# Altium PCB HU_revB.PcbDoc (part 4 of 5)
Units mm, origin at the board's own origin, x right, y up, seen from the top; angles counter-clockwise.
Board outline 164 x 90 mm, 6 copper layers (TOP, GND1, INT SIG, PWR + INT SIG, GND2, BOT), stack 1.538 mm thick; 404 components, 380 nets, 1687 pads, 342 vias.
Unrouted connection lines stored in the file: 70.
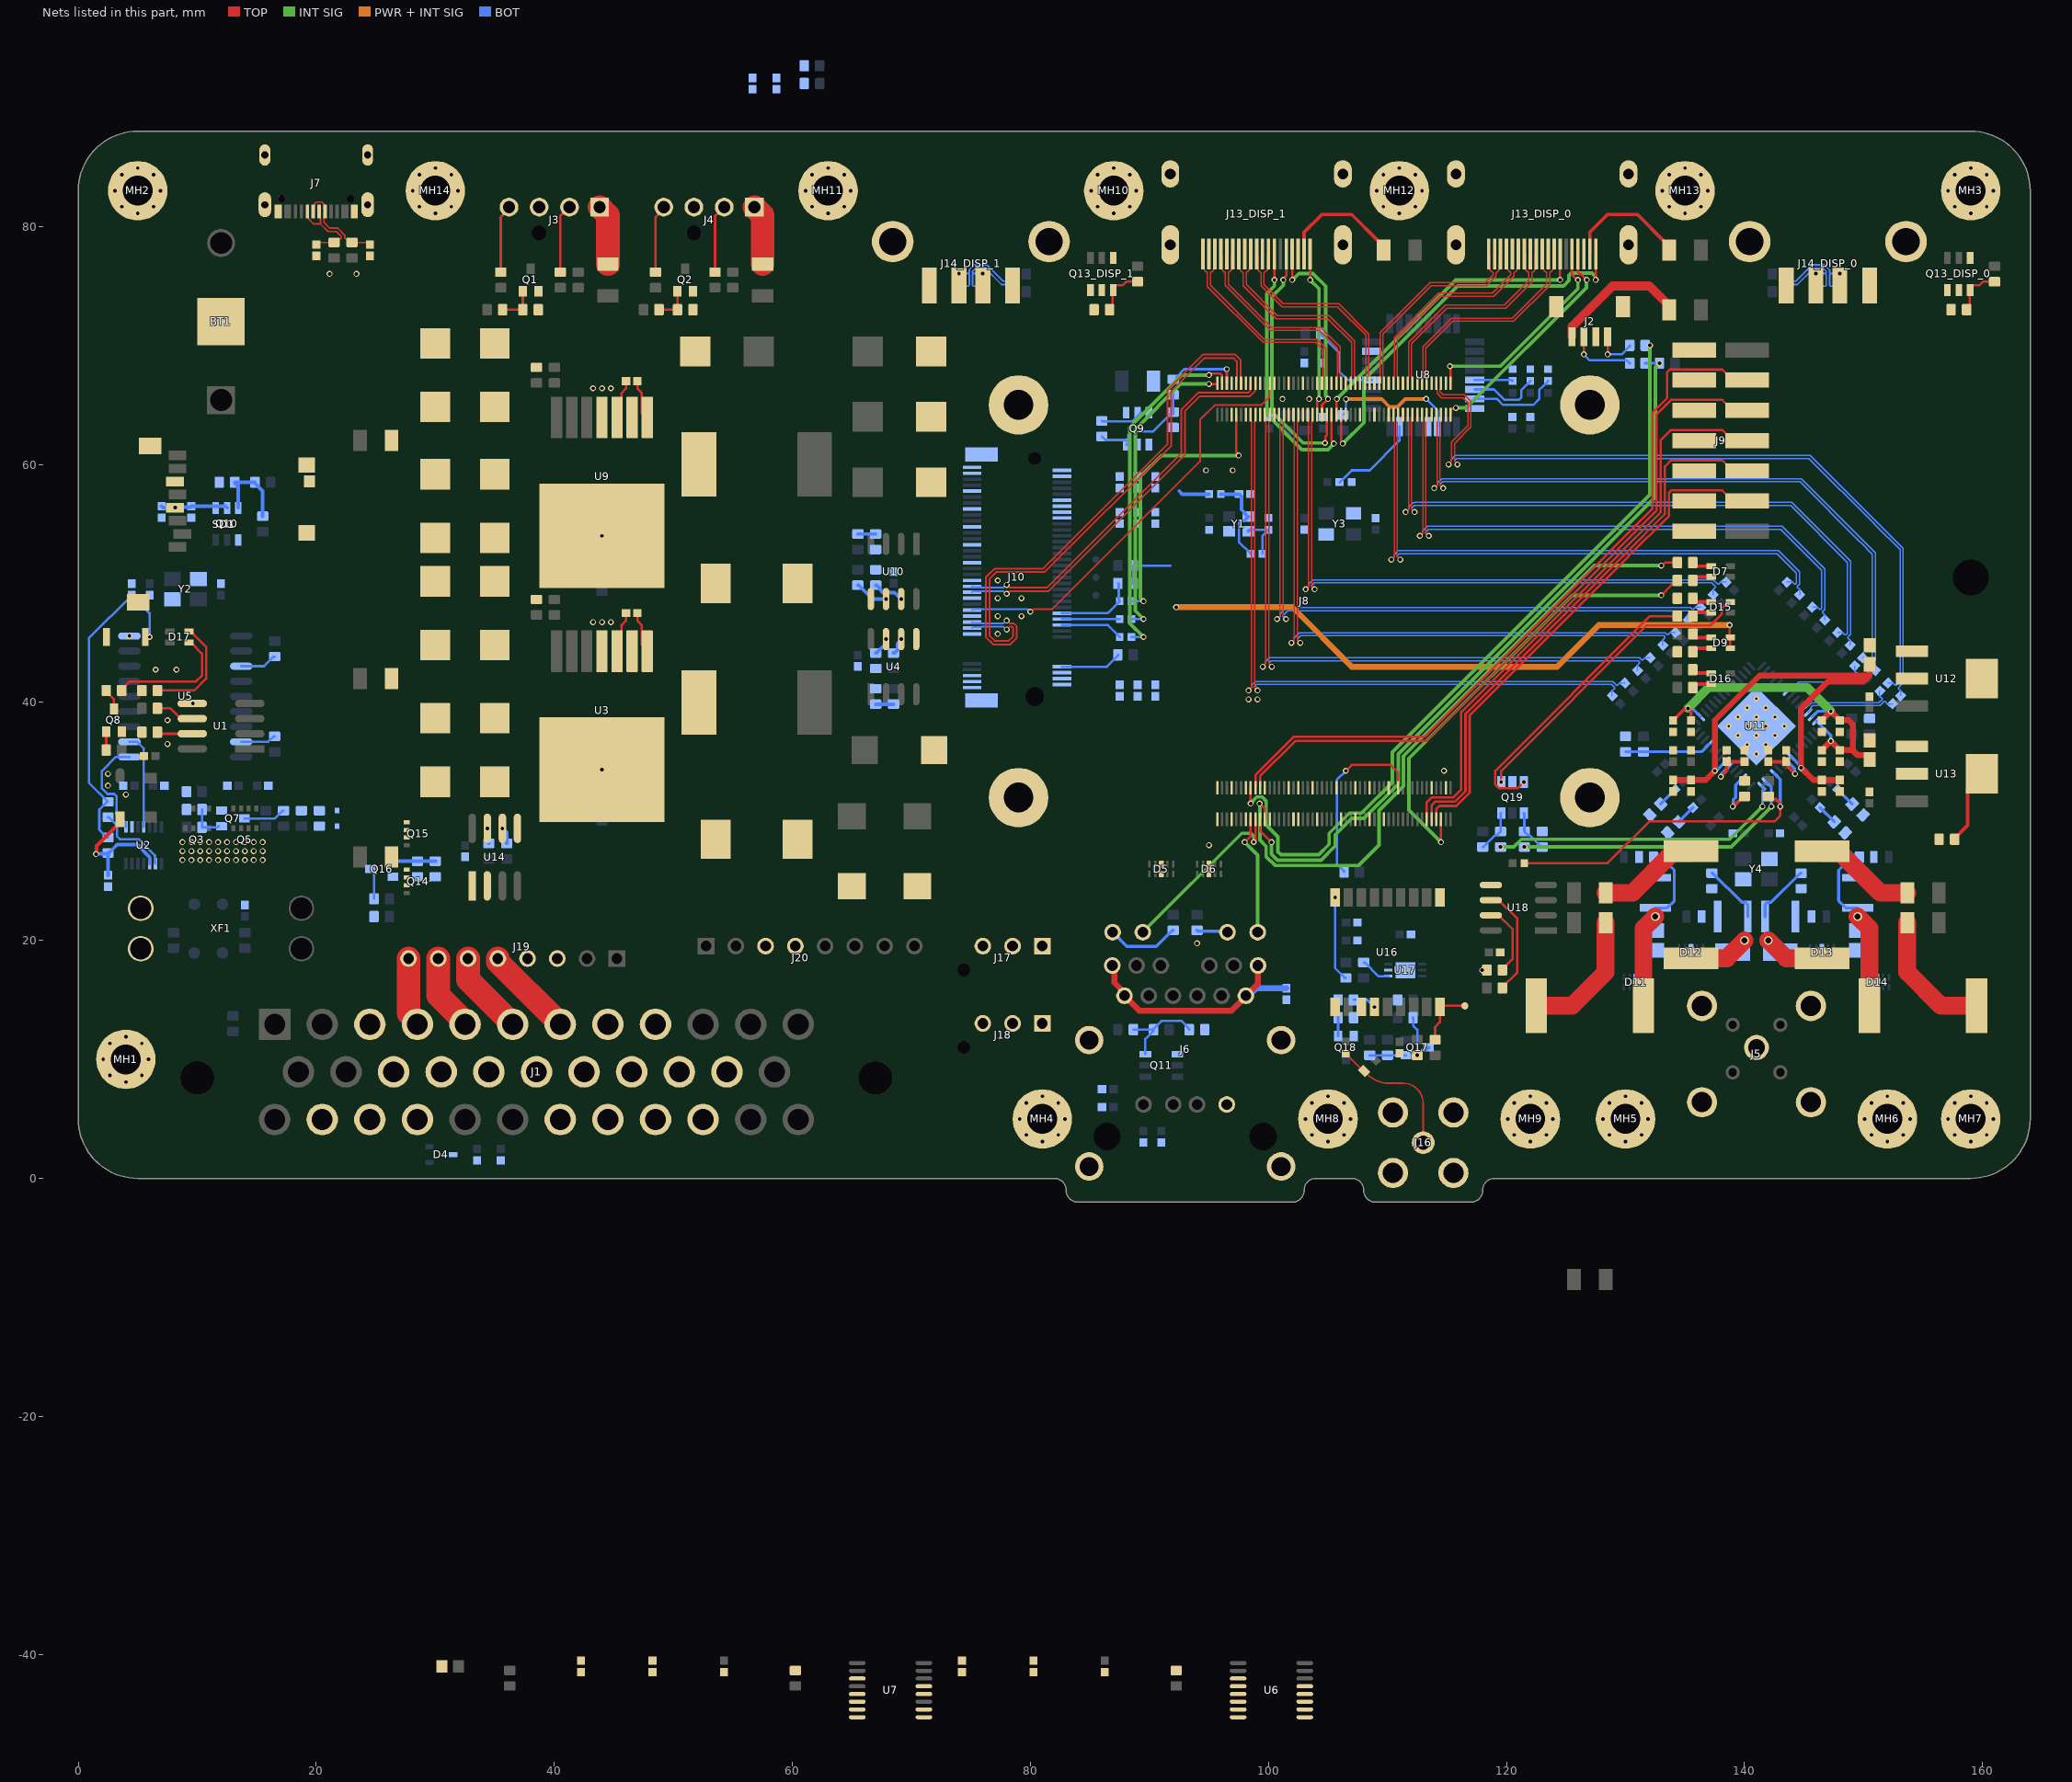
[diagram p7: the nets of this part, all layers, seen from the top]

## Via types
v1: diameter 0.5, hole 0.3, TOP to BOT, 322 vias
v2: diameter 0.5, hole 0.2, TOP to BOT, 16 vias
v3: diameter 0.75, hole 0.5, TOP to BOT, 4 vias

## Nets (pads, with @x,y where several pads share a name; then routed paths per layer and width w, separated by ;. In a path a pad name is that pad's centre, name@x,y a point inside that pad or via, vN(x,y) a via of type N, cw(c..) or ccw(c..) an arc to the next point about the centre after c; other vN are vias at no path point) (continued)
DB2_P: C126.2 U11.49 | length 7.3
  BOT w0.103: U11.49@143.563,40.917 143.818,41.172 143.993,41.172 144.532,41.711 148.775,41.711 149.434,42.371 149.434,42.456 149.237,42.653 149.237,43.055 C126.2@149.253,43.071
DB3_N: C129.2 U11.54 | length 7.7
  BOT w0.103: U11.54@145.331,39.149 145.586,39.404 145.586,39.579 145.73,39.723 151.387,39.723 151.734,40.07 151.82,40.07 152.017,39.873 152.419,39.873 C129.2@152.435,39.889
DB3_P: C128.2 U11.53 | length 7.7
  BOT w0.103: U11.53@144.977,39.503 145.232,39.757 145.407,39.757 145.625,39.976 151.282,39.976 151.556,40.249 151.556,40.334 151.359,40.531 151.359,40.934 C128.2@151.374,40.949
DBG_USB_N: C133.1 J7.A7 J7.B7 R140.1 | length 8
  TOP w0.135: J7.A7@19.75,81.25 19.832,81.332 19.832,81.86 20.01,82.038 20.49,82.038 20.668,81.86 20.668,81.332 J7.B7@20.75,81.25 20.668,81.168 20.668,80.693 20.643,80.668 20.643,80.329 21.109,79.863 21.794,79.863 22.393,79.265 22.393,79.034 22.472,78.955 22.695,78.955 R140.1@23,78.65 24.329,78.65 C133.1@24.5,78.479
DBG_USB_P: C132.1 J7.A6 J7.B6 R23.1 | length 7.6
  TOP w0.135: J7.B6@19.25,81.25 19.332,81.168 19.332,80.64 19.761,80.211 20.357,80.211 ; C132.1@20,78.479 20.171,78.65 R23.1@21.5,78.65 21.805,78.955 22.028,78.955 22.107,79.034 22.107,79.146 21.676,79.578 20.991,79.578 20.357,80.211 ; J7.A6@20.25,81.25 20.332,81.168 20.332,80.693 20.357,80.668 20.357,80.211
DES_1V2: C83.1 C88.2 C89.2 C90.2 C91.2 C98.2 C99.2 R102.2 U11.30 U11.55 U11.56 U13.2 U13.4 | length 37.2
  TOP w0.3: C98.2@134,38.479 134,38.5 134.962,39.462 135.212,39.462 v1(135.25,39.5) 135.25,39.482 135.5,39.232 C99.2@135.5,38.479 ; R102.2@157.65,28.5 157.65,28.575 158.75,29.675 158.75,32.75 U13.4@159,33
  TOP w0.5: C91.2@146.5,35.979 146.5,36 v1(147.25,36.75) ; C89.2@146.5,38.479 146.5,38.5 v1(147.25,39.25) 148,38.5 148.75,38.5 149.086,38.164 149.086,35.979 ; v1@147.306,36.694 148,36 C90.2@148,35.979 149.086,35.979 ; C83.1@150.5,35.198 150.5,35.296 150.244,35.552 149.512,35.552 149.086,35.979
  INT SIG w0.75: v1(135.25,39.5) 137,41.25 145.25,41.25 v1(147.25,39.25)
  BOT w0.25: v1(135.25,39.5) 135.298,39.452 135.659,39.452 U11.30@136.315,38.795 ; U11.55@145.685,38.795 146.139,39.25 v1(147.25,39.25) ; U11.56@146.038,38.442 147.25,37.23 v1(147.25,36.75)
DES_1V8: C81.1 C92.2 C93.2 C94.2 C95.2 U11.7 U11.21 U12.2 U12.4 | length 41.5
  TOP w0.5: C94.2@134,33.479 C95.2@135.5,33.479 136.729,33.479 v1(137.5,34.25) 137.5,38.5 141.25,42.25 150.5,42.25 C81.1@150.5,43.198 ; C92.2@148,33.479 C93.2@146.5,33.479 145.771,33.479 v1(144.75,34.5) 144.75,39.5 147,41.75 150,41.75 150.389,42.139
  BOT w0.25: v1(137.5,34.25) 137.548,34.298 137.651,34.298 U11.21@138.437,35.083 ; U11.7@143.917,35.437 144.702,34.651 144.702,34.548 v1(144.75,34.5)
DIGI_USB_DISP_0_N: C57.1 J14_DISP_0.2 R83.1 | length 7.7
  BOT w0.135: R83.1@143.65,76 143.955,75.695 143.955,75.472 144.034,75.393 144.308,75.393 145.694,76.779 146.714,76.779 147.143,76.35 147.143,76.119 147.222,76.04 ; C57.1@148,74.979 147.222,74.979 147.143,75.058 147.143,75.961 147.222,76.04 ; v1(148,76.04) 147.222,76.04
DIGI_USB_DISP_0_P: C56.1 J14_DISP_0.3 R82.1 | length 7.2
  BOT w0.135: R82.1@143.65,74.5 143.955,74.805 143.955,75.028 144.034,75.107 144.427,75.107 145.812,76.493 146.596,76.493 146.857,76.231 146.857,76.119 146.778,76.04 ; C56.1@146,74.979 146.778,74.979 146.857,75.058 146.857,75.961 146.778,76.04 ; v1(146,76.04) 146.778,76.04
DIGI_USB_DISP_1_N: C51.1 J14_DISP_1.2 R79.1 | length 7.2
  BOT w0.135: C51.1@76,74.979 75.222,74.979 75.143,75.058 75.143,75.961 75.222,76.04 ; v1(76,76.04) 75.222,76.04 ; R79.1@78.35,74.5 78.045,74.805 78.045,75.028 77.966,75.107 77.573,75.107 76.188,76.493 75.404,76.493 75.143,76.231 75.143,76.119 75.222,76.04
DIGI_USB_DISP_1_P: C50.1 J14_DISP_1.3 R76.1 | length 7.7
  BOT w0.135: C50.1@74,74.979 74.778,74.979 74.857,75.058 74.857,75.961 74.778,76.04 ; v1(74,76.04) 74.778,76.04 ; R76.1@78.35,76 78.045,75.695 78.045,75.472 77.966,75.393 77.692,75.393 76.306,76.779 75.286,76.779 74.857,76.35 74.857,76.119 74.778,76.04
DISP_5V_DISP_0: J14_DISP_0.1 Q13_DISP_0.1 Q13_DISP_0.2
DISP_5V_DISP_1: J14_DISP_1.1 Q13_DISP_1.1 Q13_DISP_1.2
DP0PUR: R69.1 U8.27 | length 11.4
  PWR + INT SIG w0.3: v1(106.514,65.486) 109.514,65.486 110.155,64.845 110.845,64.845 111.5,65.5 v1(113.25,65.5)
  BOT w0.135: R69.1@106.25,64.15 106.514,64.414 v1(106.514,65.486)
  BOT w0.2: v1(113.25,65.5) 114.2,64.55 U8.27@114.2,63.175
DPHY0_CK_N: C121.1 J8.127 | length 53.6
  TOP w0.103: v1(100.725,47) 100.774,47 100.974,47.2 100.974,63.636 100.9,63.71 J8.127@100.9,64.18
  BOT w0.103: v1(100.725,47) 100.736,47 100.974,47.238 100.974,47.428 101.498,47.953 135.469,47.953 135.613,47.808 135.698,47.808 135.895,48.005 136.298,48.005 C121.1@136.313,47.99
DPHY0_CK_P: C120.1 J8.129 | length 53
  TOP w0.103: J8.129@101.3,64.18 101.3,63.71 101.226,63.636 101.226,47.2 101.426,47 v1(101.475,47)
  BOT w0.103: v1(101.475,47) 101.464,47 101.226,47.238 101.226,47.323 101.603,47.7 135.364,47.7 135.434,47.629 135.434,47.544 135.237,47.347 135.237,46.945 C120.1@135.253,46.929
DPHY0_D0_N: C113.1 J8.115 | length 55.6
  TOP w0.103: v1(98.325,41) 98.574,41.249 98.574,63.636 98.5,63.71 J8.115@98.5,64.18
  BOT w0.103: v1(98.325,41) 98.336,41 98.574,41.238 98.574,41.428 98.898,41.753 128.941,41.753 129.249,41.444 129.334,41.444 129.531,41.641 129.934,41.641 C113.1@129.949,41.626
DPHY0_D0_P: C112.1 J8.117 | length 54.9
  TOP w0.103: J8.117@98.9,64.18 98.9,63.71 98.826,63.636 98.826,41.249 v1(99.075,41)
  BOT w0.103: v1(99.075,41) 99.064,41 98.826,41.238 98.826,41.323 99.003,41.5 128.836,41.5 129.07,41.265 129.07,41.18 128.873,40.983 128.873,40.581 C112.1@128.889,40.565
DPHY0_D1_N: C115.1 J8.121 | length 54.4
  TOP w0.103: v1(99.525,43) 99.774,43.249 99.774,63.636 99.7,63.71 J8.121@99.7,64.18
  BOT w0.103: v1(99.525,43) 99.536,43 99.774,43.238 99.774,43.428 100.088,43.743 131.194,43.743 131.371,43.566 131.456,43.566 131.653,43.763 132.055,43.763 C115.1@132.071,43.747
DPHY0_D1_P: C114.1 J8.123 | length 53.8
  TOP w0.103: J8.123@100.1,64.18 100.1,63.71 100.026,63.636 100.026,43.249 v1(100.275,43)
  BOT w0.103: v1(100.275,43) 100.264,43 100.026,43.238 100.026,43.323 100.193,43.49 131.089,43.49 131.192,43.387 131.192,43.302 130.995,43.105 130.995,42.702 C114.1@131.01,42.687
DPHY0_D2_N: C117.1 J8.133 | length 52.2
  TOP w0.103: v1(101.925,45) 102.174,45.249 102.174,63.636 102.1,63.71 J8.133@102.1,64.18
  BOT w0.103: v1(101.925,45) 101.936,45 102.174,45.238 102.174,45.428 102.598,45.853 133.326,45.853 133.492,45.687 133.577,45.687 133.774,45.884 134.177,45.884 C117.1@134.192,45.869
DPHY0_D2_P: C116.1 J8.135 | length 51.6
  TOP w0.103: J8.135@102.5,64.18 102.5,63.71 102.426,63.636 102.426,45.249 v1(102.675,45)
  BOT w0.103: v1(102.675,45) 102.664,45 102.426,45.238 102.426,45.323 102.703,45.6 133.221,45.6 133.313,45.508 133.313,45.423 133.116,45.226 133.116,44.823 C116.1@133.131,44.808
DPHY0_D3_N: C119.1 J8.139 | length 50.8
  TOP w0.103: v1(103.125,49.5) 103.374,49.749 103.374,61.036 103.374,63.636 103.3,63.71 J8.139@103.3,64.18
  BOT w0.103: v1(103.125,49.5) 103.136,49.5 103.374,49.738 103.374,49.928 103.746,50.3 137.364,50.3 137.735,49.93 137.82,49.93 138.017,50.127 138.419,50.127 C119.1@138.435,50.111
DPHY0_D3_P: C118.1 J8.141 | length 50.2
  TOP w0.103: J8.141@103.7,64.18 103.7,63.71 103.626,63.636 103.626,60.932 103.626,49.749 v1(103.875,49.5)
  BOT w0.103: v1(103.875,49.5) 103.864,49.5 103.626,49.738 103.626,49.823 103.85,50.047 137.259,50.047 137.556,49.751 137.556,49.666 137.359,49.469 137.359,49.066 C118.1@137.374,49.051
DPHY1_CK_N: C131.1 J8.187 | length 50.7
  TOP w0.103: v1(112.725,54) 112.974,54.249 112.974,62.442 112.974,63.636 112.9,63.71 J8.187@112.9,64.18
  BOT w0.103: v1(112.725,54) 112.736,54 112.974,54.238 112.974,54.428 113.346,54.8 143.158,54.8 146.743,51.215 146.743,47.806 146.566,47.629 146.566,47.544 146.763,47.347 146.763,46.945 C131.1@146.747,46.929
DPHY1_CK_P: C130.1 J8.189 | length 49.7
  TOP w0.103: J8.189@113.3,64.18 113.3,63.71 113.226,63.636 113.226,62.337 113.226,54.249 v1(113.475,54)
  BOT w0.103: v1(113.475,54) 113.464,54 113.226,54.238 113.226,54.323 113.45,54.547 143.053,54.547 146.49,51.11 146.49,47.911 146.387,47.808 146.302,47.808 146.105,48.005 145.702,48.005 C130.1@145.687,47.99
DPHY1_D0_N: C123.1 J8.175 | length 49.9
  TOP w0.103: v1(110.325,52) 110.574,52.249 110.574,61.992 110.574,63.636 110.5,63.71 J8.175@110.5,64.18
  BOT w0.103: v1(110.325,52) 110.336,52 110.574,52.238 110.574,52.428 110.898,52.753 142.847,52.753 144.619,50.981 144.619,49.925 144.444,49.751 144.444,49.666 144.641,49.469 144.641,49.066 C123.1@144.626,49.051
DPHY1_D0_P: C122.1 J8.177 | length 48.8
  TOP w0.103: J8.177@110.9,64.18 110.9,63.71 110.826,63.636 110.826,61.887 110.826,52.249 v1(111.075,52)
  BOT w0.103: v1(111.075,52) 111.064,52 110.826,52.238 110.826,52.323 111.003,52.5 142.742,52.5 144.366,50.877 144.366,50.03 144.265,49.93 144.18,49.93 143.983,50.127 143.581,50.127 C122.1@143.565,50.111
DPHY1_D1_N: C125.1 J8.181 | length 55.4
  TOP w0.103: v1(111.525,56) 111.774,56.249 111.774,61.58 111.774,63.636 111.7,63.71 J8.181@111.7,64.18
  BOT w0.103: v1(111.525,56) 111.536,56 111.774,56.238 111.774,56.428 111.967,56.622 ; 111.968,56.622 112.042,56.696 cw(c112.293,56.444) 112.293,56.8 113.878,56.8 cw(c113.877,56.444) 113.897,56.799 ccw(c113.925,57.25) 113.925,56.799 114.675,56.799 ccw(c114.675,57.25) 114.703,56.799 cw(c114.723,56.444) 114.722,56.8 143.972,56.8 148.896,51.876 148.896,45.717 148.687,45.508 148.687,45.423 148.884,45.226 148.884,44.823 C125.1@148.869,44.808
DPHY1_D1_P: C124.1 J8.183 | length 54.4
  TOP w0.103: J8.183@112.1,64.18 112.1,63.71 112.026,63.636 112.026,61.475 112.026,56.249 v1(112.275,56)
  BOT w0.103: 112.146,56.443 112.026,56.323 112.026,56.238 112.264,56 v1(112.275,56) ; 112.147,56.444 112.22,56.517 cw(c112.293,56.444) 112.293,56.547 113.877,56.547 cw(c113.877,56.444) 113.882,56.547 ccw(c113.925,57.25) 113.925,56.546 114.675,56.546 ccw(c114.675,57.25) 114.718,56.547 cw(c114.723,56.444) 114.723,56.547 143.868,56.547 148.643,51.771 148.643,45.822 148.508,45.687 148.423,45.687 148.226,45.884 147.823,45.884 C124.1@147.808,45.869
DPHY1_D2_N: C127.1 J8.193 | length 56.4
  TOP w0.103: v1(113.925,58) 114.174,58.249 114.174,63.456 114.174,63.636 114.1,63.71 J8.193@114.1,64.18
  BOT w0.103: v1(113.925,58) 113.936,58 114.174,58.238 114.174,58.428 114.546,58.8 144.758,58.8 149.979,53.579 150.911,52.646 150.985,52.572 150.985,43.564 150.808,43.387 150.808,43.302 151.005,43.105 151.005,42.702 C127.1@150.99,42.687
DPHY1_D2_P: C126.1 J8.195 | length 55.4
  TOP w0.103: J8.195@114.5,64.18 114.5,63.71 114.426,63.636 114.426,63.351 114.426,58.249 v1(114.675,58)
  BOT w0.103: v1(114.675,58) 114.664,58 114.426,58.238 114.426,58.323 114.65,58.547 144.653,58.547 149.621,53.579 149.8,53.4 150.732,52.468 150.732,43.669 150.629,43.566 150.544,43.566 150.347,43.763 149.945,43.763 C126.1@149.929,43.747
DPHY1_D3_N: C129.1 J8.194 | length 64.1
  TOP w0.103: J8.194@114.1,66.82 114.1,66.35 114.174,66.276 114.174,65.991 114.564,65.6 116.342,65.6 116.75,65.192 116.75,63.25 115.374,61.874 115.374,60.249 v1(115.125,60)
  BOT w0.103: v1(115.125,60) 115.136,60 115.374,60.238 115.374,60.428 115.698,60.753 145.505,60.753 151.179,55.079 153.243,53.014 153.318,52.94 153.318,41.653 152.93,41.265 152.93,41.18 153.127,40.983 153.127,40.581 C129.1@153.111,40.565
DPHY1_D3_P: C128.1 J8.196 | length 63.1
  TOP w0.103: J8.196@114.5,66.82 114.5,66.35 114.426,66.276 114.426,66.096 114.669,65.853 116.447,65.853 117.003,65.297 117.003,63.145 115.626,61.769 115.626,60.249 v1(115.875,60)
  BOT w0.103: v1(115.875,60) 115.864,60 115.626,60.238 115.626,60.323 115.803,60.5 145.4,60.5 150.821,55.079 151,54.9 153.065,52.835 153.065,41.758 152.751,41.444 152.666,41.444 152.469,41.641 152.066,41.641 C128.1@152.051,41.626
EEPROM_nWP: J8.20 J9.A3 | length 60.1
  TOP w0.2: J8.20@99.3,32.82 99.3,33.8 102.25,36.75 113.27,36.75 129.15,52.63 129.15,52.655 132.6,56.105 132.6,64.19 133.835,65.425 138.129,65.425 139.014,64.54 J9.A3@140.22,64.54
ETH_SYNC: J8.18 J9.A2 | length 62.9
  TOP w0.2: J8.18@98.9,32.82 98.9,33.9 102.104,37.104 113.129,37.104 128.8,52.775 128.8,52.8 132.25,56.25 132.25,64.335 133.5,65.585 133.5,67.75 133.715,67.965 138.129,67.965 139.014,67.08 J9.A2@140.22,67.08
FAN_PWM: J8.19 R1.2 R134.2 | length 63
  TOP w0.2: J8.19@99.3,30.18 99.3,29.2 v1(100.25,28.25)
  INT SIG w0.3: v1(100.25,28.25) 100.25,27.25 100.75,26.75 104.414,26.75 105.6,27.936 105.6,28.864 106.986,30.25 108.014,30.25 110.9,33.136 110.9,35.673 132.5,57.273 132.5,68.15 v1(132.85,68.5)
  BOT w0.2: R134.2@131.65,68.5 v1(132.85,68.5)
FAN_TACHO: J8.16 R133.2 | length 66.1
  TOP w0.2: v1(98.5,31.5) J8.16@98.5,32.82
  INT SIG w0.3: v1(98.5,31.5) 98.5,31.528 99.022,32.05 99.478,32.05 99.8,31.728 99.8,29.7 100.8,28.7 100.8,27.45 101.05,27.2 104.228,27.2 105.1,28.072 105.1,29 106.8,30.7 107.827,30.7 110.4,33.273 110.4,35.809 132.05,57.459 v1(132.05,70)
FL_N: J1.7 J19.5 | length 7.5
  TOP w2: J19.5@35.25,18.475 35.25,18.2 J1.7@40.376,13.074
FL_P: J1.6 J19.6 | length 7.1
  TOP w2: J19.6@32.75,18.475 32.75,16.7 J1.6@36.5,12.95
FR_N: J1.5 J19.7 | length 6.5
  TOP w2: J19.7@30.25,18.475 30.25,15.376 32.5,13.126 J1.5@32.5,12.95
FR_P: J1.4 J19.8 | length 5.7
  TOP w2: J19.8@27.75,18.475 27.75,13.876 28.376,13.25 J1.4@28.376,13.074
GND: BT1.3 C1.2 C2.2 C3.2 C4.2 C5.2 C6.2 C7.2 C8.1 C9.1 C10.2 C12.2 C13.2 C14.2 C15.2 C16.2 C17.2 C18.2 C19.2 C20.2 C21.2 C22.2 C23.2 C24.2 C25.2 C26.2 C27.2 C28.2 C29.2 C30.2 C31.2 C32.2 C33.2 C34.1 C35.1 C36.1 C37.1 C38.1 C39.1 C40.2 C41.2 C42.2 C43.2 C46.2 C47.1 C48.2 C49.2 C50.2 C51.2 C52.2 C53.2 C54.2 C55.2 C56.2 C57.2 C58.2 C59.2 C60.2 C62.2 C63.2 C64.2 C65.2 C66.2 C67.2 C68.2 C69.2 C78.1 C79.1 C80.1 C81.2 C82.1 C83.2 C84.1 C85.1 C86.1 C87.1 C88.1 C89.1 C90.1 C91.1 C92.1 C93.1 C94.1 C95.1 C96.1 C97.1 C98.1 C99.1 C100.2 C101.2 C102.2 C103.2 C104.2 C106.2 C107.2 C108.2 C109.2 C110.2 C111.2 C132.2 C133.2 D2.2 D4.3 D5.3 D5.8 D6.3 D6.8 D8.2 D10.2 D11.3 D11.8 D12.3 D12.8 D13.3 D13.8 D14.3 D14.8 J1.3 J1.8 J1.9 J1.15 J1.16 J1.17 J1.18 J1.19 J1.20 J1.21 J1.22 J1.25 J1.26 J1.27 J1.30 J1.33 J2.3 J2.5 J2.6 J3.3 J4.3 J5.MH1 J5.MH2 J5.MH3 J5.MH4 J5.MH5 J6.MH1 J6.MH2 J6.MH3 J6.MH4 J6.U4 J7.A1_B12 J7.B1_A12 J7.SH1 J7.SH2 J7.SH3 J7.SH4 J8.1 J8.2 J8.7 J8.8 J8.13 J8.14 J8.22 J8.23 J8.32 J8.33 J8.42 J8.43 J8.52 J8.53 J8.59 J8.60 J8.65 J8.66 J8.71 J8.74 J8.98 J8.107 J8.108 J8.113 J8.114 J8.119 J8.120 J8.125 J8.126 J8.131 J8.132 J8.137 J8.138 J8.144 J8.150 J8.155 J8.156 J8.161 J8.162 J8.167 J8.168 J8.173 J8.174 J8.179 J8.180 J8.185 J8.186 J8.191 J8.192 J8.197 J8.198 J8.201 J8.202 J8.203 J8.204 J9.B1 J9.B2 J9.B3 J9.B4 J9.B5 J9.B6 J9.B7 J10.1 J10.3 J10.9 J10.15 J10.21 J10.27 J10.33 J10.39 J10.45 J10.51 J10.57 J10.71 J10.73 J10.75 J10.76 J10.77 J13_DISP_0.2 J13_DISP_0.5 J13_DISP_0.8 J13_DISP_0.11 J13_DISP_0.17 J13_DISP_0.SH1 J13_DISP_0.SH2 J13_DISP_0.SH3 J13_DISP_0.SH4 J13_DISP_1.2 J13_DISP_1.5 J13_DISP_1.8 J13_DISP_1.11 J13_DISP_1.17 J13_DISP_1.SH1 J13_DISP_1.SH2 J13_DISP_1.SH3 J13_DISP_1.SH4 J14_DISP_0.4 J14_DISP_0.5 J14_DISP_0.6 J14_DISP_1.4 J14_DISP_1.5 J14_DISP_1.6 J16.2 J17.2 J18.2 J19.3 J19.4 J20.3 J20.4 MH1.1 MH2.1 MH3.1 MH4.1 MH5.1 MH6.1 MH7.1 MH8.1 MH9.1 MH10.1 MH11.1 MH12.1 MH13.1 MH14.1 MP1.1 Q1.2 Q2.2 Q7.2 Q8.2 Q9.4 Q10.4 Q11.4 Q13_DISP_0.4 Q13_DISP_1.4 Q16.2 Q18.2 Q19.5 R4.2 R7.2 R12.1 R14.1 R18.1 R30.1 R31.1 R35.1 R42.2 R46.1 R49.1 R51.1 R58.1 R61.1 R64.1 R72.2 R75.2 R80.1 R81.1 R86.1 R87.1 R91.1 R92.1 R94.1 R95.1 R98.1 R99.1 R100.1 R101.1 R102.1 R112.1 R121.2 R124.2 R128.2 R129.1 R141.2 SD1.6 SD1.10 SD1.11 SD1.12 SD1.13 SW1.1 U1.5 U2.2 U3.4 U3.8 U4.5 U5.9 U6.3 U6.12 U7.3 U7.12 U8.7 U8.24 U8.28 U9.4 U9.8 U10.5 U11.57 U12.1 U13.1 U14.5 U16.1 U16.10 U16.12 U17.5 U17.7 U18.5 Y1.2 Y2.2 Y2.4 Y3.2 Y3.4 Y4.2 Y4.4 | length 0.9
  TOP w0.2: D6.3@95,25.5 D6.8@95,26.418
  other v1: 94,19.75 95,28 4,32.25 2.5,33 2.5,34 114.75,34.25 44,34.35 7.5,36.5 7.5,38.5 9.635,39.905 98.325,40.25 99.075,40.25 6.5,42.75 8.25,42.75 4.3,45.58 77.25,45.75 43.25,46.75 44,46.75 44.75,46.75 77.25,47.25 79.25,47.25 77.25,48.75 79.25,48.75 77.25,50.25 44,54 94.75,59.5 97,59.5 101.175,65.5 103.425,65.5 43.25,66.4 44,66.4 44.75,66.4 21.125,76 23.375,76
  other v2: 141,35.667 140.222,36.444 141.778,36.444 139.444,37.222 141,37.222 142.556,37.222 138.667,38 140.222,38 141.778,38 143.333,38 139.444,38.778 141,38.778 142.556,38.778 140.222,39.556 141.778,39.556 141,40.333
GPIO_VREF: J8.78 R27.1 | length 15.2
  TOP w0.2: v1(106.5,34.25) 107,34.75 110.25,34.75 110.9,34.1 J8.78@110.9,32.82
  BOT w0.2: R27.1@106.35,25.75 106.35,25.825 105.75,26.425 105.75,33.5 v1(106.5,34.25)
GPS_nRESET: R116.2 U16.9 | length 7.2
  BOT w0.2: v1(105.6,23.6) 105.6,17.675 106.425,16.85 R116.2@106.5,16.85
HDMI0_CEC: J8.151 J13_DISP_0.13 | length 26.4
  TOP w0.2: J8.151@105.7,64.18 105.7,65.454 v1(105.743,65.497) ; v1(124.5,75.5) J13_DISP_0.13@124.5,77.69
  INT SIG w0.3: v1(105.743,65.497) 105.747,65.497 115.75,75.5 v1(124.5,75.5)
HDMI0_CK_N: J8.190 J13_DISP_0.12 | length 18.4
  TOP w0.103: J8.190@113.3,66.82 113.3,67.29 113.226,67.364 113.226,69.771 115.48,72.025 120.59,72.025 123.626,75.061 123.626,76.128 123.687,76.189 123.732,76.189 123.902,76.359 123.902,77.592 J13_DISP_0.12@124,77.69
HDMI0_CK_P: J8.188 J13_DISP_0.10 | length 18.4
  TOP w0.103: J8.188@112.9,66.82 112.9,67.29 112.974,67.364 112.974,69.875 115.376,72.277 120.485,72.277 123.374,75.166 123.374,76.128 123.313,76.189 123.268,76.189 123.098,76.359 123.098,77.592 J13_DISP_0.10@123,77.69
HDMI0_D0_N: J8.184 J13_DISP_0.9 | length 18.2
  TOP w0.103: J8.184@112.1,66.82 112.1,67.29 112.026,67.364 112.026,70.161 114.99,73.124 119.917,73.124 122.126,75.334 122.126,76.128 122.187,76.189 122.232,76.189 122.402,76.359 122.402,77.592 J13_DISP_0.9@122.5,77.69
HDMI0_D0_P: J8.182 J13_DISP_0.7 | length 18.2
  TOP w0.103: J8.182@111.7,66.82 111.7,67.29 111.774,67.364 111.774,70.266 114.885,73.377 119.812,73.377 121.874,75.439 121.874,76.128 121.813,76.189 121.768,76.189 121.598,76.359 121.598,77.592 J13_DISP_0.7@121.5,77.69
HDMI0_D1_N: J8.178 J13_DISP_0.6 | length 17.8
  TOP w0.103: J8.178@110.9,66.82 110.9,67.29 110.826,67.364 110.826,70.561 114.39,74.124 118.917,74.124 120.626,75.834 120.626,76.128 120.687,76.189 120.732,76.189 120.902,76.359 120.902,77.592 J13_DISP_0.6@121,77.69
HDMI0_D1_P: J8.176 J13_DISP_0.4 | length 17.8
  TOP w0.103: J8.176@110.5,66.82 110.5,67.29 110.574,67.364 110.574,70.666 114.285,74.377 118.812,74.377 120.374,75.939 120.374,76.128 120.313,76.189 120.268,76.189 120.098,76.359 120.098,77.592 J13_DISP_0.4@120,77.69
HDMI0_D2_N: J8.172 J13_DISP_0.3 | length 17.7
  TOP w0.103: J8.172@109.7,66.82 109.7,67.29 109.626,67.364 109.626,70.961 113.69,75.024 118.317,75.024 119.126,75.834 119.126,76.128 119.187,76.189 119.232,76.189 119.402,76.359 119.402,77.592 J13_DISP_0.3@119.5,77.69
HDMI0_D2_P: J8.170 J13_DISP_0.1 | length 17.7
  TOP w0.103: J8.170@109.3,66.82 109.3,67.29 109.374,67.364 109.374,71.066 113.585,75.277 118.212,75.277 118.874,75.939 118.874,76.128 118.813,76.189 118.768,76.189 118.598,76.359 118.598,77.592 J13_DISP_0.1@118.5,77.69
HDMI0_HOTP: J8.153 J13_DISP_0.19 | length 34.6
  TOP w0.2: J8.153@106.1,64.18 106.1,61.981 106.25,61.831 v1(106.25,61.75) ; v1(127.5,75.5) J13_DISP_0.19@127.5,77.69
  INT SIG w0.3: v1(106.25,61.75) 108,63.5 108,67.1 115.9,75 124.8,75 125.25,75.45 125.25,75.888 125.426,76.064 127.186,76.064 127.462,75.788 127.462,75.538 v1(127.5,75.5)
HDMI0_SCL: J8.200 J13_DISP_0.15 | length 18.1
  TOP w0.2: v1(115.25,68.25) 115.3,68.2 J8.200@115.3,66.82 ; J13_DISP_0.15@125.5,77.69 125.5,75.928 125.928,75.5 v1(126,75.5)
  INT SIG w0.3: v1(115.25,68.25) 119.477,68.25 126,74.773 v1(126,75.5)
HDMI0_SDA: J8.199 J13_DISP_0.16 | length 19.4
  TOP w0.2: J8.199@115.3,64.18 115.3,64.65 115.569,64.65 115.669,64.75 v1(115.75,64.75) ; J13_DISP_0.16@126,77.69 126,76.117 126.117,76 126.25,76 v1(126.75,75.5)
  INT SIG w0.3: v1(115.75,64.75) 116.614,64.75 126.712,74.848 126.712,75.462 v1(126.75,75.5)
HDMI1_CEC: J8.149 J13_DISP_1.13 | length 23.3
  TOP w0.2: v1(100.5,75.5) J13_DISP_1.13@100.5,77.69 ; J8.149@105.3,64.18 105.3,62.031 105.5,61.831 v1(105.5,61.75)
  INT SIG w0.3: v1(100.5,75.5) 100.5,75 99.85,74.35 99.85,64.214 102.814,61.25 105,61.25 v1(105.5,61.75)
HDMI1_CK_N: J8.166 J13_DISP_1.12 | length 17.4
  TOP w0.103: J13_DISP_1.12@100,77.69 99.902,77.592 99.902,76.359 99.732,76.189 99.687,76.189 99.626,76.128 99.626,75.124 101.25,73.5 105.892,73.5 108.426,70.966 108.426,67.364 108.5,67.29 J8.166@108.5,66.82
HDMI1_CK_P: J8.164 J13_DISP_1.10 | length 17.4
  TOP w0.103: J13_DISP_1.10@99,77.69 99.098,77.592 99.098,76.359 99.268,76.189 99.313,76.189 99.374,76.128 99.374,75.019 101.145,73.247 105.788,73.247 108.174,70.861 108.174,67.364 108.1,67.29 J8.164@108.1,66.82
HDMI1_D0_N: J8.160 J13_DISP_1.9 | length 17.4
  TOP w0.103: J13_DISP_1.9@98.5,77.69 98.402,77.592 98.402,76.359 98.232,76.189 98.187,76.189 98.126,76.128 98.126,75.124 100.75,72.5 105.092,72.5 107.226,70.366 107.226,67.364 107.3,67.29 J8.160@107.3,66.82
HDMI1_D0_P: J8.158 J13_DISP_1.7 | length 17.4
  TOP w0.103: J13_DISP_1.7@97.5,77.69 97.598,77.592 97.598,76.359 97.768,76.189 97.813,76.189 97.874,76.128 97.874,75.019 100.645,72.247 104.988,72.247 106.974,70.261 106.974,67.364 106.9,67.29 J8.158@106.9,66.82
HDMI1_D1_N: J8.154 J13_DISP_1.6 | length 17.4
  TOP w0.103: J13_DISP_1.6@97,77.69 96.902,77.592 96.902,76.359 96.732,76.189 96.687,76.189 96.626,76.128 96.626,75.139 100.265,71.5 104.392,71.5 106.026,69.866 106.026,67.364 106.1,67.29 J8.154@106.1,66.82
HDMI1_D1_P: J8.152 J13_DISP_1.4 | length 17.4
  TOP w0.103: J13_DISP_1.4@96,77.69 96.098,77.592 96.098,76.359 96.268,76.189 96.313,76.189 96.374,76.128 96.374,75.034 100.161,71.247 104.288,71.247 105.774,69.761 105.774,67.364 105.7,67.29 J8.152@105.7,66.82
HDMI1_D2_N: J8.148 J13_DISP_1.3 | length 17.7
  TOP w0.103: J13_DISP_1.3@95.5,77.69 95.402,77.592 95.402,76.359 95.232,76.189 95.187,76.189 95.126,76.128 95.126,75.039 99.665,70.5 104.092,70.5 104.826,69.766 104.826,67.364 104.9,67.29 J8.148@104.9,66.82
HDMI1_D2_P: J8.146 J13_DISP_1.1 | length 17.7
  TOP w0.103: J13_DISP_1.1@94.5,77.69 94.598,77.592 94.598,76.359 94.768,76.189 94.813,76.189 94.874,76.128 94.874,74.934 99.561,70.247 103.988,70.247 104.574,69.661 104.574,67.364 104.5,67.29 J8.146@104.5,66.82
HDMI1_HOTP: J8.143 J13_DISP_1.19 | length 13.9
  TOP w0.2: v1(103.5,75.5) J13_DISP_1.19@103.5,77.69 ; J8.143@104.1,64.18 104.1,65.269 104.25,65.419 v1(104.25,65.5)
  INT SIG w0.3: v1(103.5,75.5) 104.25,74.75 v1(104.25,65.5)
HDMI1_SCL: J8.147 J13_DISP_1.15 | length 21.8
  TOP w0.2: v1(101.25,75.5) 101.25,75.581 101.5,75.831 J13_DISP_1.15@101.5,77.69 ; v1(104.75,61.8) 104.8,61.85 104.8,62.35 104.9,62.45 J8.147@104.9,64.18
  INT SIG w0.3: v1(101.25,75.5) 101.25,75.05 100.3,74.1 100.3,64.4 102.9,61.8 v1(104.75,61.8)
HDMI1_SDA: J8.145 J13_DISP_1.16 | length 16.7
  TOP w0.2: v1(102,75.5) J13_DISP_1.16@102,77.69 ; J8.145@104.5,64.18 104.5,65 v1(105,65.5)
  INT SIG w0.3: v1(102,75.5) 102.55,76.05 103.728,76.05 104.8,74.978 104.8,65.754 105,65.554 v1(105,65.5)
HDMI_5V_DISP_0: F11_DISP_0.2 J13_DISP_0.18 | length 10.5
  TOP w0.3: J13_DISP_0.18@127,77.69 127,79.5 128.5,81 130.99,81 133.25,78.74 133.67,78.32 F11_DISP_0.2@133.67,78
HDMI_5V_DISP_1: F11_DISP_1.2 J13_DISP_1.18 | length 10.5
  TOP w0.3: J13_DISP_1.18@103,77.69 103,79.5 104.5,81 106.99,81 109.25,78.74 109.67,78.32 F11_DISP_1.2@109.67,78
ID_SC: J8.35
ID_SD: J8.36
LL_FR_L: J17.1
LL_FR_R: J17.3
LL_RR_L: J18.1
LL_RR_R: J18.3
LNA_EN: R123.1 U16.13 | length 2
  BOT w0.2: R123.1@107.15,15 108.3,15 v1(108.9,14.4)
LOCK: R126.2 U11.13 | length 24.4
  INT SIG w0.3: v1(121.5,27.85) 138.878,27.85 142.25,31.222 v1(142.25,31.25)
  BOT w0.25: U11.13@141.795,33.315 142.25,32.861 v1(142.25,31.25)
M2_3V3: C19.1 C20.1 C21.1 C22.1 C23.1 C24.1 C25.1 C26.1 C27.1 D9.2 D9.3 J10.2 J10.4 J10.12 J10.14 J10.16 J10.18 J10.70 J10.72 J10.74 Q9.1 Q9.2 R40.1 R41.1 R48.1 | length 59.2
  TOP w0.2: v1(138.75,46.5) 138.75,45.5 D9.3@138.8,45.45 D9.2@138.8,44.55
  PWR + INT SIG w0.5: v1(92.25,48) 102,48 107,43 124.25,43 127.75,46.5 v1(138.75,46.5)
  BOT w0.2: R41.1@88.65,50 R40.1@88.65,51.5 91.75,51.5
  BOT w0.3: 92.5,57.75 92.75,57.5 R48.1@95,57.5
MFP6: R96.1 R98.2 U11.25 | length 7.3
  BOT w0.25: R98.2@130,35.85 R96.1@131.5,35.85 136.375,35.85 U11.25@137.023,36.497
MIC_N: J1.32
MIC_P: J1.31
nBT_INH: J8.91 J9.A5 | length 46.2
  TOP w0.2: J8.91@113.7,30.18 113.7,31.35 114,31.65 115.649,31.65 116.55,32.551 116.55,39.04 129.85,52.34 129.85,52.365 133.3,55.815 133.3,59.81 133.835,60.345 138.129,60.345 139.014,59.46 J9.A5@140.22,59.46
nERRB: R130.1 U11.14 | length 25.3
  INT SIG w0.3: v1(119.5,27.85) 120.6,27.85 121.25,28.5 138.75,28.5 v1(141.5,31.25)
  BOT w0.25: U11.14@141.442,32.962 141.668,32.736 141.5,32.568 v1(141.5,31.25)
NetC1_1: C1.1 J6.1 J6.6 J6.7 J6.12 | length 20.9
  TOP w0.5: J6.12@86.88,17.89 87.052,17.718 87.052,16.441 87.9,15.594 J6.6@87.9,15.35 89.15,14.1 96.9,14.1 98.1,15.3 J6.1@98.1,15.35 99.12,16.37 J6.7@99.12,17.89
  BOT w0.5: J6.1@98.1,15.35 98.344,15.35 98.972,15.979 C1.1@101.5,15.979
NetC5_1: C5.1 D3.1 R19.2 U2.10 | length 11.4
  TOP w0.3: v1(1.5,27.25) 1.538,27.288 1.538,27.94 3.5,29.902 D3.1@3.5,30.175
  BOT w0.3: v1(1.5,27.25) 1.538,27.288 2.438,27.288 R19.2@2.5,27.35 C5.1@2.5,25.479 ; R19.2@2.575,27.35 2.95,27.725 2.95,27.728 3.272,28.05 4.973,28.05 5.998,27.025 5.998,26.459 U2.10@6,26.457
NetC7_1: C7.1 R19.1 R20.2 SW1.2 | length 27.7
  TOP w0.2: SW1.2@5.625,45.5 v1(6,45.5)
  BOT w0.2: R19.1@2.5,28.65 2.425,28.65 1.775,29.3 1.775,31 2.425,31.65 R20.2@2.5,31.65 0.9,33.25 0.9,45.4 C7.1@4.5,49 ; C7.1@4.5,49.021 C7.1@4.5,49 ; v1(6,45.5) 6,47.5 C7.1@4.5,49
NetC11_1: C11.1 U3.3 | length 3.4
  TOP w0.2: U3.3@45.27,44.45 45.645,44.825 45.645,46.487 46.021,46.864 C11.1@46.021,47.5
NetC11_2: C11.2 D8.1 L2.1 U3.1 | length 3.4
  TOP w0.2: C11.2@46.979,47.5 46.979,46.864 47.355,46.487 47.355,44.825 U3.1@47.73,44.45
NetC12_1: C12.1 C13.1 C14.1 C15.1 F3.2 U3.2
NetC28_1: C28.1 R48.2 R50.1 Y1.4 | length 7.8
  BOT w0.2: Y1.4@98.013,55.313 97.963,55.263 97.68,55.263 97.513,55.095 97.513,53.488 R50.1@98.5,52.5
  BOT w0.3: R48.2@96,57.5 C28.1@97.521,57.5 ; C28.1@97.543,57.5 97.729,57.314 97.729,56.196 97.963,55.963 97.963,55.913 98.263,55.613 Y1.4@98.313,55.613 Y1.4@98.013,55.313
NetC35_2: C35.2 C36.2 R55.2 U6.13
NetC38_2: C38.2 C39.2 R56.2 U7.13
NetC40_1: C40.1 C41.1 Q10.1 Q10.2 SD1.4 | length 5.7
  BOT w0.3: C41.1@7,56.479 7.119,56.36 v1(8.14,56.36) 8.178,56.398 9.42,56.398 C40.1@9.5,56.479 12.375,56.479 12.5,56.354 Q10.2@12.5,56.35
NetC46_1: C46.1 R67.1
NetC48_1: C48.1 R73.1
NetC61_1: C61.1 U9.3 | length 3.4
  TOP w0.2: U9.3@45.27,63.95 45.645,64.325 45.645,65.987 46.021,66.364 C61.1@46.021,67
NetC61_2: C61.2 D10.1 L3.1 U9.1 | length 3.4
  TOP w0.2: C61.2@46.979,67 46.979,66.364 47.355,65.987 47.355,64.325 U9.1@47.73,63.95
NetC62_1: C62.1 C63.1 C64.1 C65.1 F5.2 U9.2
NetC72_2: C72.2 R94.2 | length 1.7
  BOT w0.261: R94.2@132.96,31.46 C72.2@134.162,32.662
NetC73_2: C73.2 R95.2 | length 1.7
  BOT w0.261: R95.2@134.46,29.96 C73.2@135.662,31.162
NetC76_2: C76.2 R100.2 | length 1.7
  BOT w0.261: C76.2@146.338,31.162 R100.2@147.54,29.96
NetC77_2: C77.2 R101.2 | length 1.7
  BOT w0.261: C77.2@147.838,32.662 R101.2@149.04,31.46
NetC84_2: C84.2 C85.2 U11.8 | length 4.2
  TOP w0.3: C84.2@142,35.021 C85.2@143.5,35.021 143.686,34.835 143.686,34.564 v1(144.25,34)
  BOT w0.25: U11.8@143.563,35.083 144.202,34.444 144.202,34.048 v1(144.25,34)
NetC86_2: C86.2 C87.2 U11.20 | length 4.3
  TOP w0.3: v1(138,33.75) 138.5,34.25 C87.2@138.5,35.021 C86.2@140,35.021
  BOT w0.25: v1(138,33.75) 138.048,33.798 138.048,33.987 U11.20@138.79,34.73
NetC100_1: C100.1 L4.2 L5.1 R103.2 | length 13.6
  TOP w1.5: L4.2@131.5,14.5 131.5,21 v3(132.5,22)
  BOT w0.25: L5.1@132.5,22.73 133.5,22.73 134.1,23.33 134.1,25.891 133.695,26.296 133.695,26.955 R103.2@133.65,27
NetC101_1: C101.1 L7.2 L8.1 R104.2 | length 10.2
  TOP w1.5: L7.2@135.5,18.5 138.5,18.5 v3(140,20)
  BOT w0.25: R104.2@137.25,25.65 137.325,25.65 139.775,23.2 140.07,23.2 140.27,23 L8.1@140.27,22
NetC102_1: C102.1 L10.2 L11.1 R105.2 | length 13.6
  TOP w1.5: v3(149.5,22) 150.5,21 L10.2@150.5,14.5
  BOT w0.25: R105.2@148.35,27 148.305,26.955 148.305,26.296 147.9,25.891 147.9,23.33 148.5,22.73 L11.1@149.5,22.73
NetC103_1: C103.1 L13.2 L14.1 R106.2 | length 10.2
  TOP w1.5: v3(142,20) 143.5,18.5 L13.2@146.5,18.5
  BOT w0.25: L14.1@141.73,22 141.73,23 141.93,23.2 142.225,23.2 144.675,25.65 R106.2@144.75,25.65
NetD2_1: D2.1 R13.1 R14.2 U6.4
NetD7_1: D7.1 R25.1 | length 1.7
  TOP w0.3: R25.1@135.65,50.25 135.65,50.3 135.9,50.55 D7.1@137.2,50.55
NetD7_4: D7.4 R26.1 | length 1.7
  TOP w0.3: R26.1@135.65,51.75 135.65,51.7 135.9,51.45 D7.4@137.2,51.45
NetD9_1: D9.1 R42.1 | length 1.7
  TOP w0.3: R42.1@135.65,44.25 135.65,44.3 135.9,44.55 D9.1@137.2,44.55
NetD9_4: D9.4 R44.1 | length 1.7
  TOP w0.3: R44.1@135.65,45.75 135.65,45.7 135.9,45.45 D9.4@137.2,45.45
NetD15_1: D15.1 R127.2 | length 1.7
  TOP w0.3: R127.2@135.65,47.25 135.65,47.3 135.9,47.55 D15.1@137.2,47.55
NetD15_3: D15.3 Q19.4 | length 26.3
  TOP w0.2: v1(119.55,33.3) 119.55,34.245 131.78,46.475 137.129,46.475 138.102,47.448 138.102,47.902 138.65,48.45 D15.3@138.8,48.45
NetD15_4: D15.4 R129.2 | length 1.7
  TOP w0.3: R129.2@135.65,48.7 135.9,48.45 D15.4@137.2,48.45
NetD16_1: D16.1 R138.2 | length 1.7
  TOP w0.3: R138.2@135.65,41.25 135.65,41.3 135.9,41.55 D16.1@137.2,41.55
NetD16_4: D16.4 R139.2 | length 1.7
  TOP w0.3: R139.2@135.65,42.75 135.65,42.7 135.9,42.45 D16.4@137.2,42.45
NetD17_1: D17.1 R141.1 | length 9.2
  TOP w0.2: R141.1@6.65,41 9.75,41 10.75,42 10.75,44.65 9.45,45.95 D17.1@9.3,45.95
NetD17_4: D17.4 R142.1 | length 10.4
  TOP w0.2: R142.1@3.65,41 3.65,41.075 4.325,41.75 9.9,41.75 10.4,42.25 10.4,44.1 D17.4@9.5,45
NetF1_1: F1.1 J2.1 | length 11.5
  TOP w0.75: J2.1@125.5,70.725 125.5,71.6 128.9,75 131.99,75 133.67,73.32 F1.1@133.67,73
NetF2_1: F2.1 J3.1 | length 5.1
  TOP w2: J3.1@43.81,81.62 44.5,80.93 F2.1@44.5,76.83
NetF4_1: F4.1 J4.1 | length 5.1
  TOP w2: J4.1@56.81,81.62 57.5,80.93 F4.1@57.5,76.83
NetF7_2: F7.2 Q14.1 Q14.2 Q14.3 Q15.1 Q15.2 Q15.3 R109.2
NetF10_2: F10.2 Q9.5 Q9.6 R43.2 | length 3.6
  BOT w0.2: R43.2@86,63.65 86.05,63.6 88.525,63.6 89.025,64.1 89.275,64.35
NetF12_2: F12.2 L4.1 | length 11.2
  TOP w1.5: L4.1@122.5,14.5 125.5,14.5 128.33,17.33 F12.2@128.33,21.5
NetF13_2: F13.2 L7.1 | length 8.6
  TOP w1.5: F13.2@128.33,24 130.6,24 133.95,27.35 135.35,27.35 L7.1@135.5,27.5
NetF14_2: F14.2 L10.1 | length 11.2
  TOP w1.5: F14.2@153.67,21.5 153.67,17.33 156.5,14.5 L10.1@159.5,14.5
NetF15_2: F15.2 L13.1 | length 8.6
  TOP w1.5: L13.1@146.5,27.5 146.65,27.35 148.05,27.35 151.4,24 F15.2@153.67,24
nETH_G_LED: J6.15 J8.17 | length 15.3
  TOP w0.2: v1(98.764,28.264) 98.764,28.345 98.9,28.481 J8.17@98.9,30.18
  INT SIG w0.3: J6.15@89.445,20.69 97.755,29 98.5,29 98.764,28.736 v1(98.764,28.264)
nETH_Y_LED: J6.13 J8.15 | length 10.2
  TOP w0.2: v1(98,28.25) 98.5,28.75 J8.15@98.5,30.18
  INT SIG w0.3: v1(98,28.25) 99.095,27.155 J6.13@99.095,20.69
NetJ2_2: J2.2 R134.1 | length 5.6
  TOP w0.2: v1(126.5,69.25) J2.2@126.5,70.725
  BOT w0.2: v1(126.5,69.25) 127,68.75 130.1,68.75 R134.1@130.35,68.5
NetJ2_4: J2.4 R133.1 | length 3.7
  TOP w0.2: v1(128.5,69.25) J2.4@128.5,70.725
  BOT w0.2: v1(128.5,69.25) 129.675,69.25 130.35,69.925 R133.1@130.35,70
NetJ3_2: J3.2 R135.1 | length 5.8
  TOP w0.2: R135.1@40.5,76.15 40.5,80.85 J3.2@41.27,81.62
NetJ3_4: J3.4 R47.1 | length 5.8
  TOP w0.2: R47.1@35.5,76.15 35.5,80.776 36.19,81.466 J3.4@36.19,81.62
NetJ4_2: J4.2 R136.1 | length 5.8
  TOP w0.2: R136.1@53.5,76.15 53.5,80.85 J4.2@54.27,81.62
NetJ4_4: J4.4 R132.1 | length 5.8
  TOP w0.2: R132.1@48.5,76.15 48.5,80.776 49.19,81.466 J4.4@49.19,81.62
NetJ6_14: J6.14 R9.2 | length 2.6
  BOT w0.3: R9.2@94,20.85 94.08,20.77 96.475,20.77 J6.14@96.555,20.69
NetJ6_16: J6.16 R8.2 | length 6.1
  BOT w0.3: J6.16@86.905,20.69 88.095,19.5 90.575,19.5 91.925,20.85 R8.2@92,20.85
NetJ10_68: J10.68 R39.2 | length 5.2
  BOT w0.2: J10.68@82.65,43 86.425,43 87.35,43.925 R39.2@87.35,44
NetJ16_1: J16.1 L16.2 R115.2 | length 11.7
  TOP w0.14: R115.2@106.5,10.5 107.924,9.076 ccw(c108.032,9.184) L16.2@108.032,9.032 108.319,8.744 ccw(c110.115,10.54) 110.115,8 111.293,8 cw(c111.293,6.293) 112.5,7.5 cw(c111.293,6.293) 113,6.293 J16.1@113,3
NetL5_2: L5.2 L6.1 R103.1
NetL8_2: L8.2 L9.1 R104.1
NetL11_2: L11.2 L12.1 R105.1
NetL14_2: L14.2 L15.1 R106.1
NetQ1_1: Q1.1 R3.2 R4.1 | length 3.1
  TOP w0.2: R3.2@35.8,73 R4.1@37.35,73 Q1.1@37.35,74.55
NetQ2_1: Q2.1 R6.2 R7.1 | length 3.1
  TOP w0.2: R6.2@48.8,73 R7.1@50.35,73 Q2.1@50.35,74.55
NetQ3_5-6-7-8: Q3.5-6-7-8 Q5.5-6-7-8 XF1.3 XF1.4
  other v1: 8.75,26.75 9.5,26.75 10.25,26.75 11,26.75 11.75,26.75 12.5,26.75 13.25,26.75 14,26.75 14.75,26.75 15.5,26.75 8.75,27.5 9.5,27.5 10.25,27.5 11,27.5 11.75,27.5 12.5,27.5 13.25,27.5 14,27.5 14.75,27.5 15.5,27.5 8.75,28.25 9.5,28.25 10.25,28.25 11,28.25 11.75,28.25 12.5,28.25 13.25,28.25 14,28.25 14.75,28.25 15.5,28.25
NetQ7_1: Q7.1 R17.2 R18.2 | length 2.8
  BOT w0.2: R17.2@10.4,29.5 11.7,29.5 Q7.1@11.8,29.6 ; R17.2@10.4,29.6 R18.2@10.4,31
NetQ7_3: Q7.3 R16.1 | length 3.6
  BOT w0.2: Q7.3@13.95,30.25 16.525,30.25 17.175,30.9 R16.1@17.25,30.9
NetQ8_1: Q8.1 R143.2 | length 1.6
  TOP w0.2: R143.2@2.35,36 Q8.1@2.35,37.55
NetQ8_3: Q8.3 R142.2 | length 1.8
  TOP w0.2: R142.2@2.35,41 2.35,40.925 3,40.275 Q8.3@3,39.45
NetQ9_3: Q9.3 R43.1 R45.1 R46.2 | length 9.2
  BOT w0.2: R43.1@86,62.35 86.3,62.05 87.95,62.05 Q9.3@88,62 ; Q9.3@88.05,61.65 88.2,61.8 88.2,62.45 88.5,62.75 90.275,62.75 91.775,64.25 R46.2@92,64.25 ; R46.2@92,64.4 R45.1@92,66
NetQ10_3: Q10.3 R59.1 R60.1 R61.2 | length 7
  BOT w0.3: R61.2@13.15,58.425 13.45,58.125 Q10.3@13.45,56.35 ; R61.2@13.15,58.5 R60.1@14.85,58.5 14.85,58.425 15.5,57.775 R59.1@15.5,55.65
NetQ11_3: Q11.3 R62.1 R63.1 R64.2 | length 7.7
  BOT w0.2: R63.1@88.65,12.5 R62.1@90.35,12.5 90.35,12.425 89.65,11.725 Q11.3@89.65,10.45 ; R62.1@90.35,12.575 91,13.225 92.7,13.225 93.35,12.575 R64.2@93.35,12.5
NetQ13_DISP_0_3: Q13_DISP_0.3 R65_DISP_0.1 R66_DISP_0.1 | length 4.2
  TOP w0.2: R66_DISP_0.1@158.65,73 158.9,73.25 158.9,74.6 Q13_DISP_0.3@158.95,74.65 158.95,74.875 159.125,75.05 159.725,75.05 160.025,75.35 R65_DISP_0.1@161,75.35
NetQ13_DISP_1_3: Q13_DISP_1.3 R65_DISP_1.1 R66_DISP_1.1 | length 4.2
  TOP w0.2: R66_DISP_1.1@86.65,73 86.9,73.25 86.9,74.6 Q13_DISP_1.3@86.95,74.65 86.95,74.875 87.125,75.05 87.725,75.05 88.025,75.35 R65_DISP_1.1@89,75.35
NetQ14_5-6-7-8: Q14.5-6-7-8 Q15.5-6-7-8 U14.1 U14.2
NetQ16_1: Q16.1 R111.2 R112.2 | length 3.6
  BOT w0.3: Q16.1@26.45,26.65 R111.2@30,26.65
NetQ16_3: Q16.3 R110.1 | length 2.7
  BOT w0.2: Q16.3@24.55,26 24.6,26 24.85,25.75 R110.1@24.85,23.5
NetQ17_1: Q17.1 R117.1 R118.1 | length 3
  BOT w0.2: R117.1@108.5,10.35 Q17.1@111.55,10.35
NetQ17_3: Q17.3 R119.1 R120.1 | length 4.5
  BOT w0.2: R120.1@112.15,13.5 112.158,13.492 112.158,12.842 112.5,12.5 v1(112.5,10.35)
  BOT w0.3: v1(112.5,10.35) 112.95,10.8 113.25,10.8 Q17.3@113.45,11
NetQ18_1: Q18.1 R123.2 R124.1 | length 3
  BOT w0.2: Q18.1@105.85,11.95 R123.2@105.85,15
NetQ19_1: Q19.1 R126.1 R128.1 | length 3.6
  BOT w0.2: Q19.1@121.45,30.7 121.5,30.65 R126.1@121.5,29.15 121.8,28.85 121.925,28.85 122.925,27.85 R128.1@123,27.85
NetQ19_3: Q19.3 R130.2 R131.2 | length 3.6
  BOT w0.2: R131.2@118,27.85 118.075,27.85 119.075,28.85 119.2,28.85 R130.2@119.5,29.15 119.5,30.65 Q19.3@119.55,30.7
NetQ19_6: Q19.6 R127.1 | length 24.6
  TOP w0.2: v1(121.45,33.3) 120.95,32.8 119.343,32.8 119.05,33.093 119.05,34.24 132.06,47.25 R127.1@134.35,47.25
NetR10_1: R10.1 U6.5
NetR10_2: R10.2 U1.7 | length 3
  TOP w0.2: R10.2@6.65,37.5 6.785,37.365 U1.7@9.584,37.365
NetR11_1: R11.1 U1.6 | length 3.3
  TOP w0.2: R11.1@6.65,39.5 7.75,39.5 8.615,38.635 U1.6@9.584,38.635
NetR20_1: R20.1 U2.9 | length 6.5
  BOT w0.2: R20.1@2.5,30.35 2.575,30.35 3.25,29.675 3.25,28.75 3.5,28.5 5.088,28.5 6.448,27.14 6.448,26.509 U2.9@6.5,26.457
NetR28_2: R28.2 R31.2 U6.8 | length 1.7
  BOT w0.3: R28.2@44,31.1 R31.2@44,32.75
NetR32_1: R32.1 U6.7
NetR32_2: R32.2 U4.7 | length 1.6
  BOT w0.3: R32.2@67,44.15 67.075,44.15 67.827,44.902 67.827,45.278 v1(67.865,45.316)
NetR33_1: R33.1 U4.6 | length 1.5
  BOT w0.3: R33.1@68.5,44.15 68.575,44.15 68.825,44.4 68.825,44.952 69.135,45.262 v1(69.135,45.316)
NetR34_1: R34.1 R35.2 U6.6 | length 1.5
  BOT w0.3: R35.2@67,39.85 R34.1@68.5,39.85
NetR50_2: R50.2 R51.2 Y1.1 | length 3.9
  BOT w0.2: Y1.1@98.425,54.5 R51.2@100,54.5 99.5,54 R50.2@99.5,52.5
  BOT w0.3: Y1.1@98.313,54.388 Y1.1@98.425,54.5
NetR52_2: R52.2 U5.17 | length 3
  BOT w0.2: U5.17@13.7,36.69 15.965,36.69 16.425,37.15 R52.2@16.5,37.15
NetR53_1: R53.1
  other v1: 117.95,17.5
NetR53_2: R53.2 U18.7 | length 6.1
  TOP w0.2: U18.7@118.684,22.115 119.35,22.115 120.5,20.965 120.5,18.425 119.65,17.575 R53.2@119.65,17.5
NetR54_2: R54.2 U5.12 | length 3.1
  BOT w0.2: U5.12@13.7,43.04 15.615,43.04 16.425,43.85 R54.2@16.5,43.85
NetR66_DISP_0_2: R66_DISP_0.2
NetR66_DISP_1_2: R66_DISP_1.2
NetR77_1: R77.1 R80.2 U8.31 | length 7.6
  BOT w0.2: R80.2@106,58.5 106.425,58.925 106.425,58.929 106.996,59.5 108.5,59.5 111,62 U8.31@111,63.175
NetR78_1: R78.1 R81.2 U8.21 | length 3.2
  BOT w0.2: U8.21@117.325,67.1 120.4,67.1 R81.2@120.5,67
NetR84_2: R84.2 R87.2 U6.11 | length 1.7
  BOT w0.3: R84.2@44,50.65 R87.2@44,52.3
NetR88_1: R88.1 U6.10
NetR88_2: R88.2 U10.7 | length 2.7
  BOT w0.3: R88.2@67,49.85 67.075,49.85 67.325,49.6 67.325,49.525 67.616,49.234 68.585,49.234 v1(69.135,48.684)
NetR89_1: R89.1 U10.6 | length 2.8
  BOT w0.3: R89.1@65.5,49.85 65.575,49.85 66.741,48.684 v1(67.865,48.684)
NetR90_1: R90.1 R91.2 U6.9 | length 1.5
  BOT w0.3: R90.1@65.5,54.15 R91.2@67,54.15
NetR92_2: R92.2 U11.17 | length 4.1
  TOP w0.3: v1(139,31.25) 139.038,31.288 139.113,31.288 139.925,32.1 R92.2@140,32.1
  BOT w0.25: v1(139,31.25) 139.048,31.298 139.048,31.819 139.25,32.021 139.25,33.068 U11.17@139.851,33.669
NetR107_2: R107.2 U14.7 | length 1.3
  BOT w0.3: v1(34.365,29.416) 34.403,29.378 34.403,28.247 R107.2@34.5,28.15
NetR108_1: R108.1 U14.6 | length 1.4
  BOT w0.3: v1(35.635,29.416) 36,29.051 R108.1@36,28.15
NetR111_1: R111.1
NetR122_2: R122.2 TP4.1 U16.18 | length 5.1
  TOP w0.2: R122.2@114,11.65 114,12.725 114.4,13.125 U16.18@114.4,14.4 114.5,14.5 TP4.1@116.5,14.5
NetR125_1: R125.1 U17.4 | length 2.6
  BOT w0.2: R125.1@108,18.15 108.075,18.15 109.225,17 U17.4@110.075,17
NetR144_1: R144.1 U18.6 | length 9.2
  TOP w0.2: U18.6@118.684,23.385 119.35,23.385 120.9,21.835 120.9,17.325 119.65,16.075 R144.1@119.65,16
NetSD1_9: SD1.9
NetU2_1: U2.1 U5.1 | length 8.7
  BOT w0.2: U2.1@4,29.543 4,29.88 3.947,29.932 3.926,29.932 3.225,30.633 3.225,32.095 3.02,32.3 2.45,32.3 2,32.75 2,34.25 3.17,35.42 U5.1@4.3,35.42
NetU2_4: U2.4 U5.2 | length 8
  BOT w0.2: U5.2@4.3,36.69 4.95,36.69 5.5,36.14 U2.4@5.5,29.543
NetU7_5: U7.5
NetU7_6: U7.6
NetU7_7: U7.7
NetU7_8: U7.8
NetU7_9: U7.9
NetU7_10: U7.10
nLED_ACT: J8.21 R26.2 | length 54.8
  TOP w0.2: v1(99.25,31.5) 99.7,31.05 J8.21@99.7,30.18 ; v1(133,51.5) 133.081,51.5 133.331,51.75 R26.2@134.35,51.75
  INT SIG w0.3: v1(99.25,31.5) 99.288,31.462 99.288,28.434 99.8,27.922 99.8,27.064 100.564,26.3 107.6,26.3 109.3,28 109.3,30.9 111.35,32.95 111.35,35.486 127.364,51.5 v1(133,51.5)
nLED_PWR: J8.95 R25.2 | length 38.9
  TOP w0.2: v1(114.5,28.25) J8.95@114.5,30.18 ; v1(133,49) 133.88,49.88 134.05,49.88 134.35,50.18 R25.2@134.35,50.25
  INT SIG w0.3: v1(114.5,28.25) 111.8,30.95 111.8,35.3 125.5,49 v1(133,49)
NP0: R68.1 R72.1 U8.22 | length 6
  BOT w0.2: U8.22@117.325,66.3 118.95,66.3 119.833,65.417 121.017,65.417 121.25,65.65 121.25,66.254 121.571,66.575 121.575,66.575 R68.1@122,67
NP1: R70.1 R75.1 U8.23 | length 7.7
  BOT w0.2: U8.23@117.325,65.5 119.2,65.5 119.7,65 122.25,65 122.75,65.5 122.75,66.254 123.071,66.575 123.075,66.575 R70.1@123.5,67
nPCIE_CLKREQ: J10.52 R37.1 | length 4.9
  BOT w0.2: J10.52@82.65,47 R37.1@87.5,47
nPCIE_RST: J10.50 R36.1 R41.2 | length 6.8
  BOT w0.2: J10.50@82.65,47.5 86.5,47.5 R36.1@87.5,48.5 87.425,48.575 87.425,49.925 R41.2@87.35,50
nPCIE_WAKE: J10.54 R38.1 | length 5.3
  BOT w0.2: J10.54@82.65,46.5 86.5,46.5 R38.1@87.5,45.5
nPWDN: R93.1 R145.2 U11.11 | length 28.5
  TOP w0.2: R145.2@121.412,26.5 128.5,26.5 132,30 142.5,30 143,30.5 v1(143,31.25)
  TOP w0.3: R93.1@142,32.1 142.25,31.85 142.65,31.85 142.962,31.538 142.962,31.288 v1(143,31.25)
  BOT w0.261: U11.11@142.503,34.023 142.503,34.014 143,33.517 v1(143,31.25)
nPWR_BTN: J8.92
nRPI_BOOT: J8.93 J9.A6 | length 43.4
  TOP w0.2: J8.93@114.1,30.18 114.1,31.05 114.35,31.3 115.793,31.3 116.9,32.407 116.9,38.895 130.2,52.195 130.2,52.22 133.65,55.67 133.65,57.62 133.835,57.805 138.129,57.805 139.014,56.92 J9.A6@140.22,56.92
nTUSB2036_RST: R137.1 U8.4 | length 6.9
  BOT w0.2: R137.1@104.4,71 104.4,70.925 106,69.325 106,67.75 106.65,67.1 U8.4@108.675,67.1
nWIFI_INH: J8.89 J9.A4 | length 49
  TOP w0.2: J8.89@113.3,30.18 113.3,31.6 113.7,32 115.504,32 116.2,32.696 116.2,39.185 129.5,52.485 129.5,52.51 132.95,55.96 132.95,62 133.835,62.885 138.129,62.885 139.014,62 J9.A4@140.22,62
PCIE_CLK_N: J8.112 J10.53 | length 47.2
  TOP w0.155: v1(78,46.875) 78.041,46.875 78.263,46.652 78.586,46.652 78.855,46.383 78.855,45.424 78.306,44.874 76.876,44.874 76.25,45.5 76.25,50.5 77,51.25 81.069,51.25 91.525,61.706 91.525,66.275 94.5,69.25 97.181,69.25 97.652,68.779 97.652,67.383 97.677,67.358 97.677,66.843 J8.112@97.7,66.82
  BOT w0.155: J10.53@75.1,46.75 75.173,46.677 75.863,46.677 75.888,46.652 76.576,46.652 77.737,46.652 77.959,46.875 v1(78,46.875)
PCIE_CLK_P: J8.110 J10.55 | length 44.6
  TOP w0.155: v1(78,46.125) 78.041,46.125 78.263,46.348 78.46,46.348 78.55,46.257 78.55,45.55 78.179,45.179 77.002,45.179 76.555,45.626 76.555,50.374 77.126,50.945 81.195,50.945 91.83,61.58 91.83,66.149 94.626,68.945 97.055,68.945 97.348,68.652 97.348,67.383 97.323,67.358 97.323,66.843 J8.110@97.3,66.82
  BOT w0.155: J10.55@75.1,46.25 75.173,46.323 75.863,46.323 75.888,46.348 76.702,46.348 77.737,46.348 77.959,46.125 v1(78,46.125)
PCIE_nCLKREQ: J8.102 R37.2 | length 25.8
  TOP w0.2: v1(95,66.75) 95.7,66.75 J8.102@95.7,66.82
  INT SIG w0.3: v1(89.5,47) 88.8,47.7 88.8,62.94 92.61,66.75 v1(95,66.75)
  BOT w0.2: R37.2@88.5,47 v1(89.5,47)
PCIE_nRST: J8.109 R36.2 | length 24.1
  TOP w0.2: J8.109@97.3,64.18 97.3,61.031 97.5,60.831 v1(97.5,60.75)
  INT SIG w0.3: v1(89.5,48.5) 89.5,48.526 89.25,48.776 89.25,59 91,60.75 v1(97.5,60.75)
  BOT w0.2: R36.2@88.5,48.5 v1(89.5,48.5)
PCIE_nWAKE: J8.104 R38.2 | length 29.4
  TOP w0.2: v1(95,67.5) 95.081,67.5 95.221,67.64 95.904,67.64 96.1,67.444 J8.104@96.1,66.82
  INT SIG w0.3: v1(89.5,45.5) 88.35,46.65 88.35,63.126 92.724,67.5 v1(95,67.5)
  BOT w0.2: R38.2@88.5,45.5 v1(89.5,45.5)
PCIE_PWR_EN: J8.106 R45.2 | length 6.1
  TOP w0.2: J8.106@96.5,66.82 v1(96.5,68)
  BOT w0.2: R45.2@92.275,66.925 92.275,67.35 92.925,68 v1(96.5,68)
PCIE_RX0_N: J8.118 J10.43 | length 33.8
  TOP w0.155: v1(78,49.125) 78.041,49.125 78.263,49.348 81.529,49.348 93,60.819 93,64.5 94.218,65.718 96,65.718 98.42,65.718 98.877,66.175 98.877,66.797 J8.118@98.9,66.82
  BOT w0.155: J10.43@75.1,49.25 75.173,49.323 75.863,49.323 75.888,49.348 76.702,49.348 77.737,49.348 77.959,49.125 v1(78,49.125)
PCIE_RX0_P: J8.116 J10.41 | length 33.2
  TOP w0.155: v1(78,49.875) 78.041,49.875 78.263,49.652 81.402,49.652 92.695,60.945 92.695,64.626 94.091,66.023 96.126,66.023 98.294,66.023 98.477,66.206 98.477,66.797 J8.116@98.5,66.82
  BOT w0.155: J10.41@75.1,49.75 75.173,49.677 75.863,49.677 75.888,49.652 76.576,49.652 77.737,49.652 77.959,49.875 v1(78,49.875)
PCIE_TX0_N: J8.124 J10.49 | length 35.8
  TOP w0.155: v1(80,47.625) 80.041,47.625 80.263,47.848 81.848,47.848 94.25,60.25 94.25,63.75 95.5,65 99.431,65 100.052,65.621 100.052,66.257 100.077,66.282 100.077,66.797 J8.124@100.1,66.82
  BOT w0.155: J10.49@75.1,47.75 75.173,47.823 75.863,47.823 75.888,47.848 79.737,47.848 79.959,47.625 v1(80,47.625)